# Altium PCB MCU_PANEL.PcbDoc
Units mil, origin at the board's own origin, x right, y up, seen from the top; angles counter-clockwise.
Board outline 3689 x 2909 mil, 2 copper layers (Top Layer, Bottom Layer); 22 components, 0 nets, 110 pads, 0 vias.
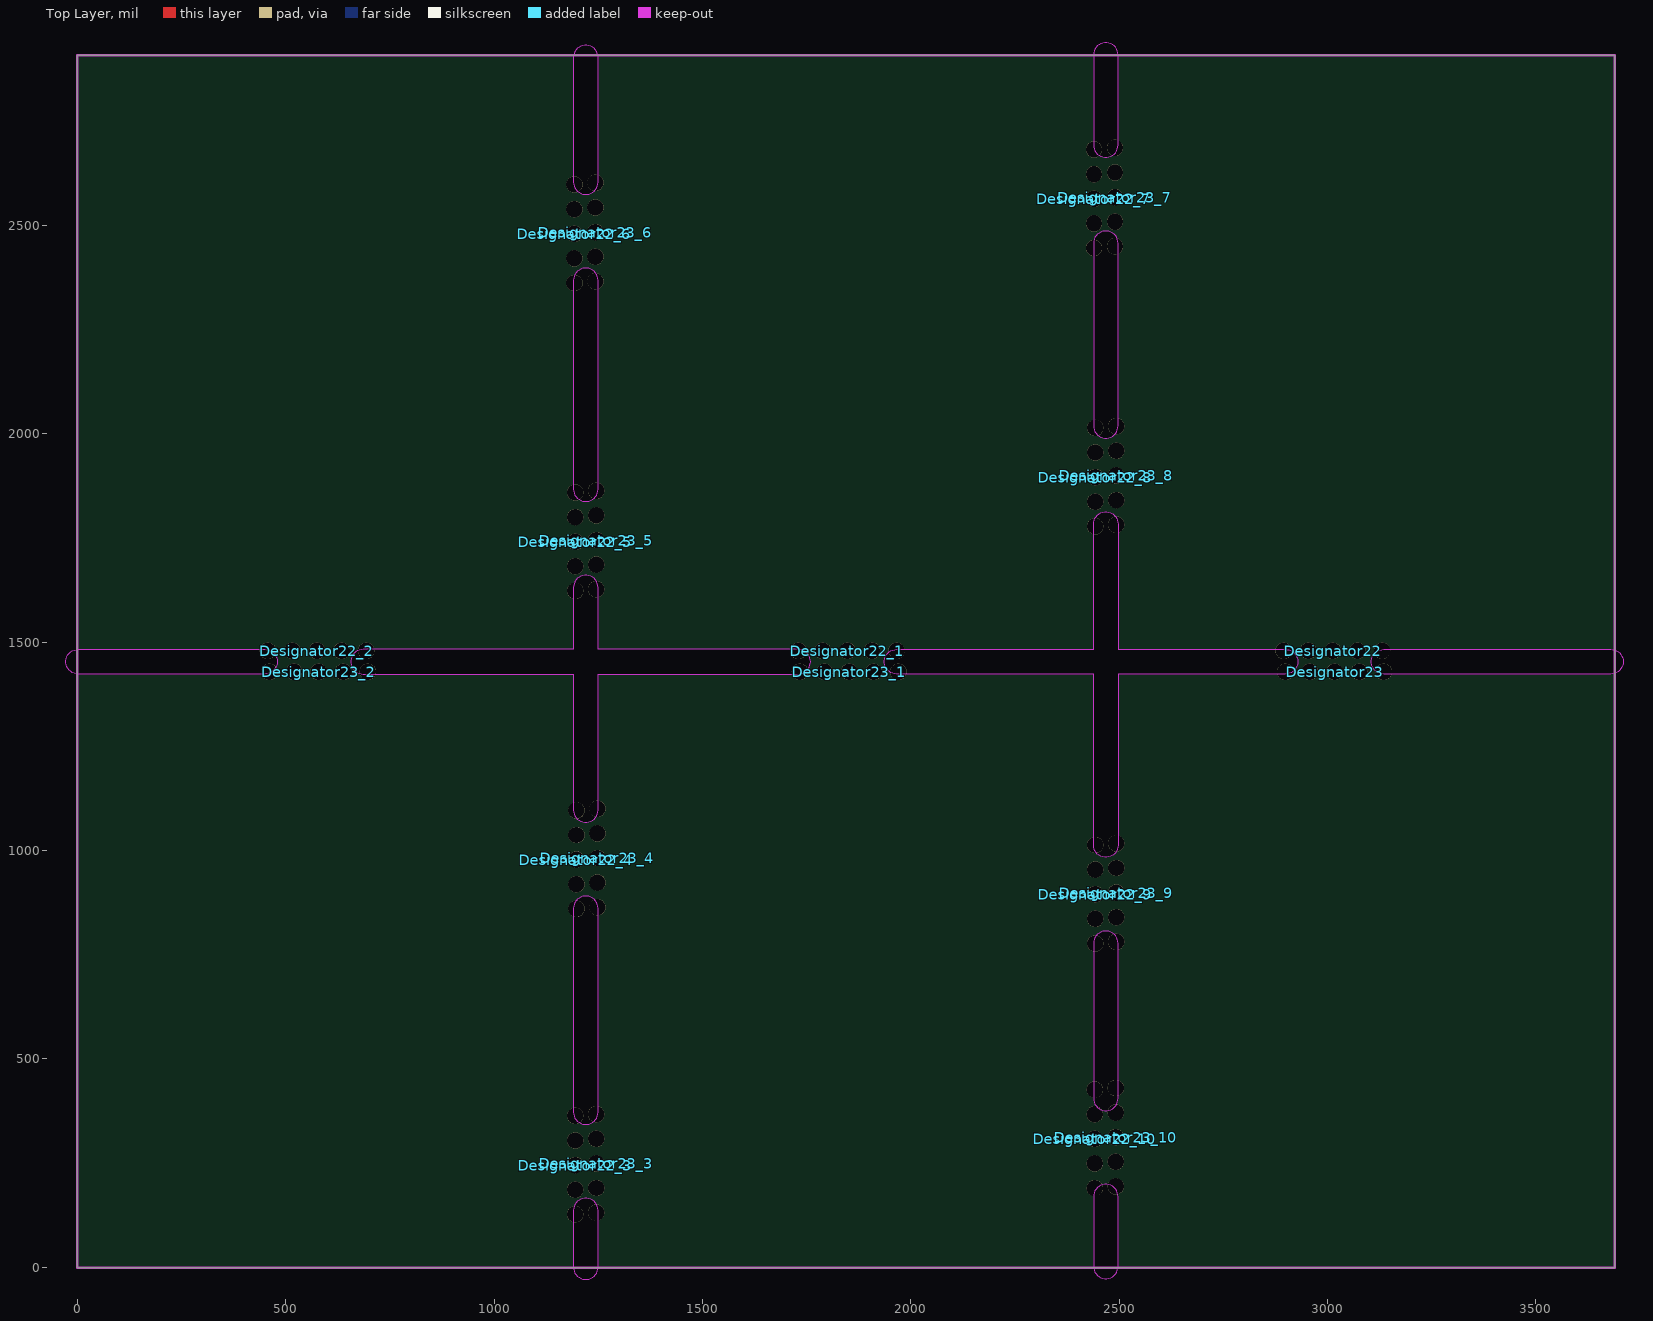
[diagram p0: Top Layer view]
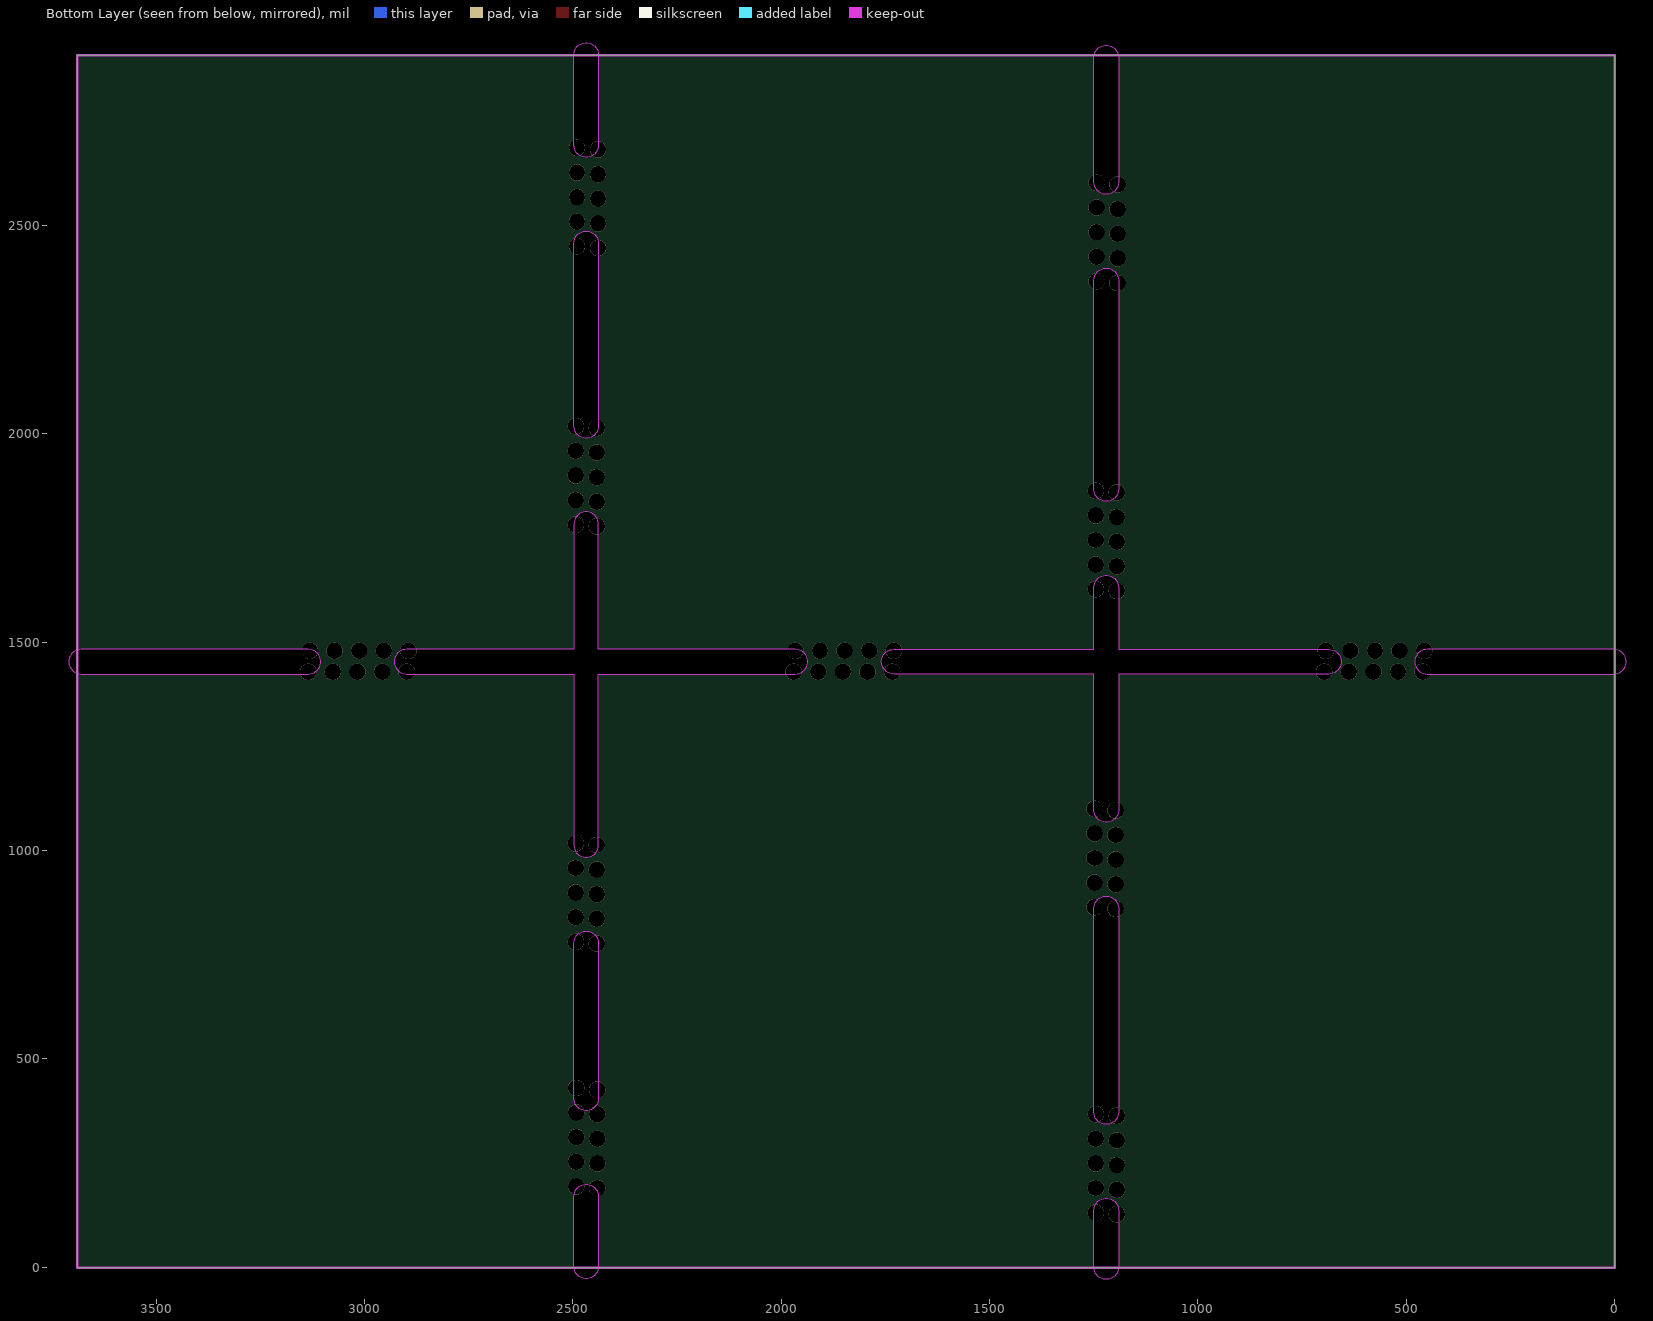
[diagram p1: Bottom Layer view, seen from below]

## Layer stack, top to bottom
Top Solder: solder mask 0.4, Solder Resist, Dk 3.5
Top Layer: signal copper 1.4
Dielectric 1: dielectric 12.6, FR-4, Dk 4.8
Bottom Layer: signal copper 1.4
Bottom Solder: solder mask 0.4, Solder Resist, Dk 3.5

## Board outline
0,-1 3689,-1 3689,2908 0,2908
cut-out: 2438.46,405 ccw(c2468,405) 2497.54,405 2497.54,777 ccw(c2468,777) 2438.46,777
cut-out: 2438.46,2 ccw(c2468,2) 2497.54,2 2497.54,169 ccw(c2468,169) 2438.46,169
cut-out: 1190.46,0 ccw(c1220,0) 1249.54,0 1249.54,136 ccw(c1220,136) 1190.46,136
cut-out: 1190.46,372 ccw(c1220,372) 1249.54,372 1249.54,861 ccw(c1220,861) 1190.46,861
cut-out: 2438.46,2019 ccw(c2468,2019) 2497.54,2019 2497.54,2457 ccw(c2468,2457) 2438.46,2457
cut-out: 2438.46,2693 ccw(c2468,2693) 2497.54,2693 2497.54,2909 ccw(c2468,2909) 2438.46,2909
cut-out: 1190.46,2604 ccw(c1220,2604) 1249.54,2604 1249.54,2903 ccw(c1220,2903) 1190.46,2903
cut-out: 1190.46,1867 ccw(c1220,1867) 1249.54,1867 1249.54,2368 ccw(c1220,2368) 1190.46,2368
cut-out: 3135,1423.46 cw(c3135,1453) 3135,1482.54 3680,1482.54 cw(c3680,1453) 3709.54,1453 cw(c3680,1453) 3680,1423.46
cut-out: 1966,1423.46 cw(c1966,1453) 1966,1482.54 2438.46,1482.54 2438.46,1783 cw(c2468,1783) 2497.54,1783 2497.54,1482.54 2899,1482.54 cw(c2899,1453) 2928.54,1453 cw(c2899,1453) 2899,1423.46 2497.54,1423.46 2497.54,1013 cw(c2468,1013) 2438.46,1013 2438.46,1423.46
cut-out: 686,1423.46 1190.46,1423.46 1190.46,1097 ccw(c1220,1097) 1249.54,1097 1249.54,1423.46 1730,1423.46 ccw(c1730,1453) 1759.54,1453 ccw(c1730,1453) 1730,1482.54 1249.54,1482.54 1249.54,1631 ccw(c1220,1631) 1190.46,1631 1190.46,1482.54 686,1482.54 ccw(c686,1453)
cut-out: 2,1423.46 cw(c2,1453) 2,1482.54 450,1482.54 cw(c450,1453) 479.54,1453 cw(c450,1453) 450,1423.46

## Design rules (kind name [scope] priority, off if disabled: settings)
Clearance [All] p1: gap=10 ignorepadtopadclearanceinfootprint=FALSE except(0: Arc-Hole Track-Hole SMDPad-Hole THPad-Hole Via-Hole Fill-Hole Poly-Hole Region-Hole Text-Hole)
PolygonConnect [All] p1: connectstyle=Relief reliefconductorwidth=10 reliefentries=4 polygonreliefangle="90 Angle" airgapwidth=10
RoutingVias [All] p1: holewidth=28 width=50 viastyle="Through Hole" minholewidth=28 minwidth=50 maxholewidth=28 maxwidth=50
SolderMaskExpansion [All] p1: expansion=4 istentingtop=FALSE
Width [All] p1: maxlimit=10 minlimit=10 preferedwidth=10
30 further rules are at their usual default settings.

## Components (designator, comment, footprint, x,y, rotation, side; value= is the part's Value field where it differs from the comment)
Designator22 "Comment" "STAMP HOLE" 2894.83,1479.38 r0 top
Designator22_1 "Comment" "STAMP HOLE" 1729.83,1479.38 r0 top
Designator22_2 "Comment" "STAMP HOLE" 456.83,1479.38 r0 top
Designator22_3 "Comment" "STAMP HOLE" 1194.62,126.83 r90 top
Designator22_4 "Comment" "STAMP HOLE" 1197.62,859.83 r90 top
Designator22_5 "Comment" "STAMP HOLE" 1194.62,1622.83 r90 top
Designator22_6 "Comment" "STAMP HOLE" 1192.62,2361.83 r90 top
Designator22_7 "Comment" "STAMP HOLE" 2439.62,2445.83 r90 top
Designator22_8 "Comment" "STAMP HOLE" 2442.62,1777.83 r90 top
Designator22_9 "Comment" "STAMP HOLE" 2442.62,776.83 r90 top
Designator22_10 "Comment" "STAMP HOLE" 2441.62,189.83 r90 top
Designator23 "Comment" "STAMP HOLE" 2898.83,1429 r0 top
Designator23_1 "Comment" "STAMP HOLE" 1733.83,1429 r0 top
Designator23_2 "Comment" "STAMP HOLE" 460.83,1429 r0 top
Designator23_3 "Comment" "STAMP HOLE" 1245,130.83 r90 top
Designator23_4 "Comment" "STAMP HOLE" 1248,863.83 r90 top
Designator23_5 "Comment" "STAMP HOLE" 1245,1626.83 r90 top
Designator23_6 "Comment" "STAMP HOLE" 1243,2365.83 r90 top
Designator23_7 "Comment" "STAMP HOLE" 2490,2449.83 r90 top
Designator23_8 "Comment" "STAMP HOLE" 2493,1781.83 r90 top
Designator23_9 "Comment" "STAMP HOLE" 2493,780.83 r90 top
Designator23_10 "Comment" "STAMP HOLE" 2492,193.83 r90 top

## Footprints (in the part's own frame and the unit in brackets; to place one, negate y for a bottom-side part, rotate by r counter-clockwise, add the part's x,y. Pads: shape width x height; smd on the part's side, far side on the other; paste and mask are expansions set on the pad)
"STAMP HOLE" [mm]
  round 1 hole 1 mask+0.102: 29(0,0) 30(1.5,0) 31(3,0) 32(4.5,0) 33(6,0)

## Nets (pads, with @x,y where several pads share a name; then routed paths per layer and width w, separated by ;. In a path a pad name is that pad's centre, name@x,y a point inside that pad or via, vN(x,y) a via of type N, cw(c..) or ccw(c..) an arc to the next point about the centre after c; other vN are vias at no path point)
pads on no net: Designator22.29 Designator22.30 Designator22.31 Designator22.32 Designator22.33 Designator22_1.29 Designator22_1.30 Designator22_1.31 Designator22_1.32 Designator22_1.33 Designator22_2.29 Designator22_2.30 Designator22_2.31 Designator22_2.32 Designator22_2.33 Designator22_3.29 Designator22_3.30 Designator22_3.31 Designator22_3.32 Designator22_3.33 Designator22_4.29 Designator22_4.30 Designator22_4.31 Designator22_4.32 Designator22_4.33 Designator22_5.29 Designator22_5.30 Designator22_5.31 Designator22_5.32 Designator22_5.33 Designator22_6.29 Designator22_6.30 Designator22_6.31 Designator22_6.32 Designator22_6.33 Designator22_7.29 Designator22_7.30 Designator22_7.31 Designator22_7.32 Designator22_7.33 Designator22_8.29 Designator22_8.30 Designator22_8.31 Designator22_8.32 Designator22_8.33 Designator22_9.29 Designator22_9.30 Designator22_9.31 Designator22_9.32 Designator22_9.33 Designator22_10.29 Designator22_10.30 Designator22_10.31 Designator22_10.32 Designator22_10.33 Designator23.29 Designator23.30 Designator23.31 Designator23.32 Designator23.33 Designator23_1.29 Designator23_1.30 Designator23_1.31 Designator23_1.32 Designator23_1.33 Designator23_2.29 Designator23_2.30 Designator23_2.31 Designator23_2.32 Designator23_2.33 Designator23_3.29 Designator23_3.30 Designator23_3.31 Designator23_3.32 Designator23_3.33 Designator23_4.29 Designator23_4.30 Designator23_4.31 Designator23_4.32 Designator23_4.33 Designator23_5.29 Designator23_5.30 Designator23_5.31 Designator23_5.32 Designator23_5.33 Designator23_6.29 Designator23_6.30 Designator23_6.31 Designator23_6.32 Designator23_6.33 Designator23_7.29 Designator23_7.30 Designator23_7.31 Designator23_7.32 Designator23_7.33 Designator23_8.29 Designator23_8.30 Designator23_8.31 Designator23_8.32 Designator23_8.33 Designator23_9.29 Designator23_9.30 Designator23_9.31 Designator23_9.32 Designator23_9.33 Designator23_10.29 Designator23_10.30 Designator23_10.31 Designator23_10.32 Designator23_10.33

## Keep-outs
Keep-Out Layer:
  the board outline again, w6

## Silkscreen, mask and mechanical layers (free items; w line width, h text height)
Mechanical 1:
  lines w59.06: 2,1453 450,1453 ; 686,1453 1730,1453 ; 1220,0 1220,136 ; 1220,372 1220,861 ; 1220,1097 1220,1631 ; 1220,1867 1220,2368 ; 1220,2604 1220,2903 ; 1966,1453 2899,1453 ; 2468,169 2468,2 2470,0 ; 2468,405 2468,777 ; 2468,1013 2468,1783 ; 2468,2019 2468,2457 ; 2468,2693 2468,2909 ; 3135,1453 3680,1453

## Panel: embedded boards
"MCU_BOARD.PcbDoc" at 3677.31,9.74, 3 rows x 2 columns, spacing 1248.74 x 1483.74, rotation 90